# Altium PCB MDBT42Q.PcbDoc
Units mm, origin at the board's own origin, x right, y up, seen from the top; angles counter-clockwise.
Board outline 105.25 x 26.75 mm, 2 copper layers (Top Layer, Bottom Layer); 38 components, 27 nets, 160 pads, 4 vias.
Unrouted connection lines stored in the file: 1.
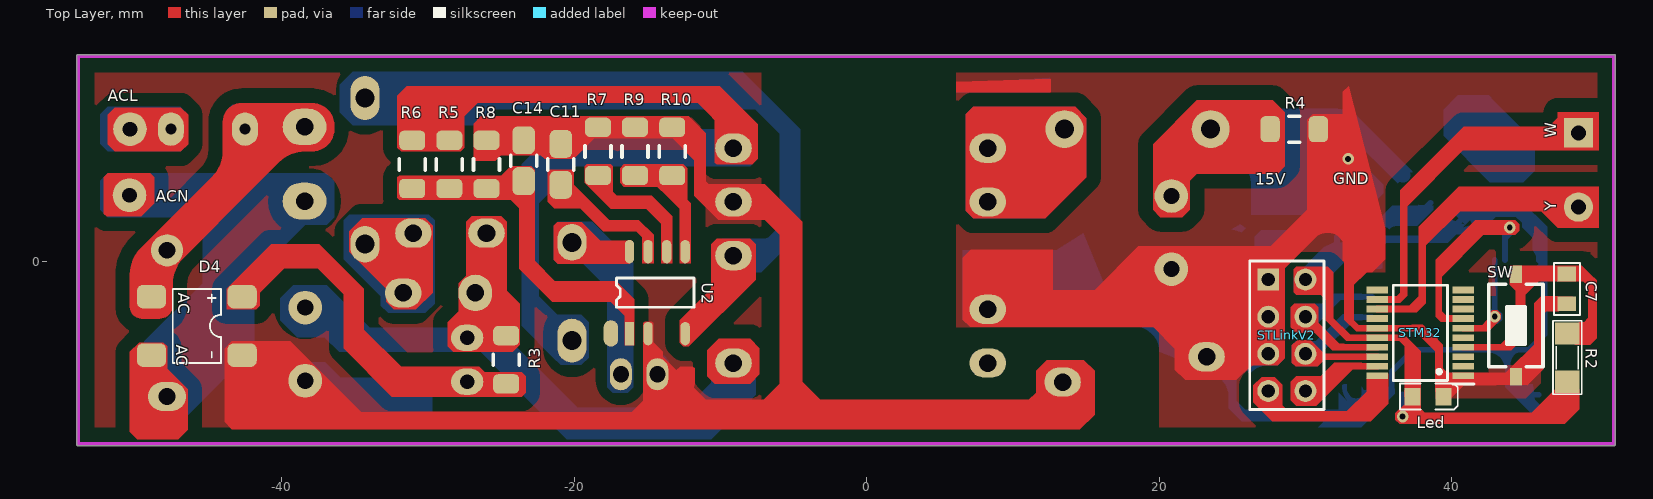
[diagram p0: Top Layer view]
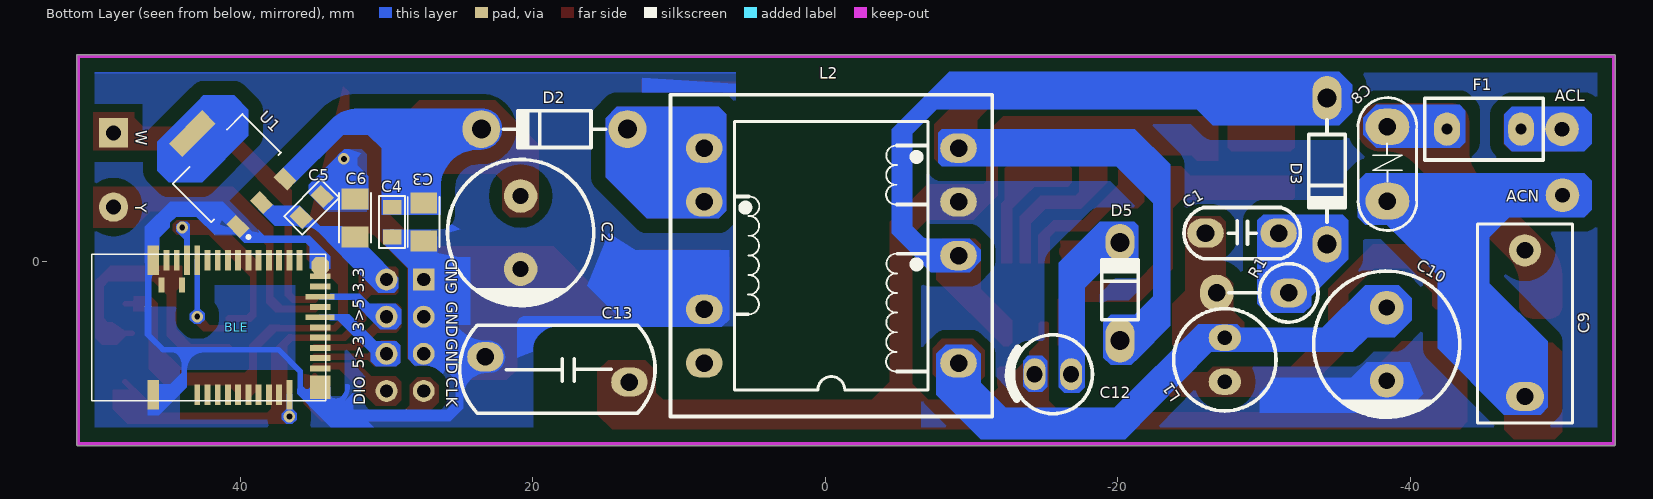
[diagram p1: Bottom Layer view, seen from below]

## Layer stack, top to bottom
Top Solder: solder mask 0.0102, Solder Resist, Dk 3.5
Top Layer: signal copper 0.0356
Dielectric1: dielectric 0.32, FR-4, Dk 4.8
Bottom Layer: signal copper 0.0356
Bottom Solder: solder mask 0.0102, Solder Resist, Dk 3.5

## Board outline
-53.923,-12.606 cw(c-53.923,-12.479) -54.05,-12.479 -54.05,14.021 cw(c-53.923,14.021) -53.921,14.148 51.077,14.148 cw(c51.077,14.021) 51.204,14.021 51.204,-12.479 cw(c51.077,-12.479) 51.077,-12.606

## Design rules (kind name [scope] priority, off if disabled: settings)
Clearance [All] p1: gap=1 ignorepadtopadclearanceinfootprint=FALSE
PlaneClearance [All] p1: clearance=1
PlaneConnect [All] p1: planeconnectstyle=Direct reliefexpansion=0.508 reliefentries=4 reliefconductorwidth=0.254 reliefairgap=0.254
PolygonConnect [All] p1: connectstyle=Direct reliefconductorwidth=0.254 reliefentries=4 polygonreliefangle="90 Angle" airgapwidth=0.254
RoutingVias [All] p1: holewidth=0.711 width=1.27 viastyle="Through Hole" minholewidth=0.711 minwidth=1.27 maxholewidth=0.711 maxwidth=1.27
SolderMaskExpansion [All] p1: expansion=0.102
Width [All] p1: maxlimit=1.016 minlimit=0.254 preferedwidth=0.635 minimp=50.000000 maximp=50.000000 favimp=50.000000
28 further rules are at their usual default settings.

## Components (designator, comment, footprint, x,y, rotation, side; value= is the part's Value field where it differs from the comment)
BLE "MODULE_MDBT42Q" PCB_MDBT42Q_10X16 50.149,-4.516 r90 bottom
C1 "1nF/1KV" 1nF/1KV -28.509,1.933 r180 bottom
C2 "220uF/25V" 220uF/25V 20.829,1.969 r90 bottom
C3 "C3216X5R1A106K160AB" CAPC3216X180 27.458,2.695 r270 bottom
C4 "2u2" 0805C-GENERIC 29.617,3.444 r270 bottom
C5 "2u2" 0805C-GENERIC 35.66,3.179 r135 bottom
C6 "C3216X5R1A106K160AB" CAPC3216X180 32.157,2.974 r90 bottom
C7 "10u" 0805C-GENERIC 47.88,-1.115 r270 top
C8 "FNR07K561" FNR07K561 -48.876,-60.821 r270 bottom
C9 "104/305V MKP" "104/305V MKP" -47.853,-4.243 r270 bottom
C10 "4.7uF/400V" 4.7uF/400V -38.404,-5.662 r180 bottom
C11 "68pF/50V" Cap_X -20.929,6.632 r0 top
C12 "10uF/50V" 10uF/50V -15.575,-7.719 r180 bottom
C13 "2.2nF" "CAP ISOLATOR" 18.314,-7.389 r180 bottom
C14 "68pF/50V" Cap_X -23.469,6.886 r0 top
D2 "SF18G" SF18G 18.521,9.045 r90 bottom
D3 "FR107" FR107 -34.315,6.175 r0 bottom
D4 "ABS16" ABS16 -45.821,-4.417 r270 top
D5 "FR107" "RF107 dung" -20.167,-2.06 r180 bottom
F1 "1A" "Cau chi hop 1A" -45.059,9.045 r180 bottom
L1 "3mH" INDUCTOR_x -27.33,-6.728 r270 bottom
L2 "EFD20" MBA-9 -0.419,0.393 r180 bottom
Led "LED SMD" LED_0805_Blue 38.38,-9.243 r0 top (schematic designator D1)
R1 "120K ohm" "R1W dung" -28.701,-2.156 r90 bottom value=1K
R2 "RESISTOR SMD" RES-SM-1206 47.905,-4.925 r270 top value=1K
R3 "5K6" RES_X#1 -24.663,-6.728 r90 top
R4 "10K" RES_X#2 29.234,9.045 r180 bottom
R5 "33K" RES_X#1 -28.549,6.634 r270 top
R6 "33K" RES_X#1 -31.089,6.634 r270 top
R7 "0R" RES_X#1 -18.389,7.521 r90 top
R8 "5K6" RES_X#1 -26.009,6.63 r90 top
R9 "2R7" RES_X#1 -15.849,7.521 r270 top
R10 "2R7" RES_X#1 -13.309,7.521 r90 top
STLinkV2 "Header 4X2" HDR2X4 27.458,-1.242 r270 top
STM32 "STM32F070F6P6" SOP65P640X120-20N 37.855,-4.884 r180 top
SW "SW-SMD" SW-SMD 44.4,-4.386 r270 top
U1 "AMS1117-3.3" SOT229P700X180-4N 40.92,6.378 r135 bottom
U2 "IC MP024-10" MP024-10 -14.325,-2.131 r0 bottom

## Footprints (in the part's own frame and the unit in brackets; to place one, negate y for a bottom-side part, rotate by r counter-clockwise, add the part's x,y. Pads: shape width x height; smd on the part's side, far side on the other; paste and mask are expansions set on the pad)
1nF/1KV [mm]
  oval 2.5x2 hole 1.2: 1(-2.5,0) 2(2.5,0)
  silkscreen extent -3.97,-1.75 3.99,1.75
4.7uF/400V [mm]
  round 2.3 hole 1.1 mask+0.127: 1(0,2.5) 2(0,-2.5)
  silkscreen extent -5,-5.02 5,5
10uF/50V [mm]
  oval 1.5x2.2 hole 1.1 mask+0.106: 1(1.25,0) 2(-1.25,0)
  silkscreen extent -3.05,-2.7 2.7,2.7
"104/305V MKP" [mm]
  round 2.2 hole 1.15: 1(-5,0)
  oval 2x2.6 hole 1.15: 2(5,0)
  silkscreen extent -6.8,-3.25 6.8,3.25
220uF/25V [mm]
  round 2.3 hole 1.1 mask+0.127: 1(2.5,0) 2(-2.5,0)
  silkscreen extent -5.02,-5 5,5
0805C-GENERIC [mil] "CAPACITOR 0805"
  rect 40x50 smd: 1(-10,0) 2(70,0)
  silkscreen extent -40,-35 100,35, body extent -11,-25 70,25, height 26
ABS16 [mm]
  rrect50% 1.6x2 smd: 1(2,-3.1) 2(-2,3.1) 3(-2,-3.1) 4(2,3.1)
  silkscreen extent -2.54,-1.65 2.54,1.65
"CAP ISOLATOR" [mm]
  oval 2.5x2 hole 1.2: 1(4.925,-0.862) 2(-4.925,0.863)
  silkscreen extent -6.68,-2.99 6.68,3.01
Cap_X [mil] "SMD, no Pol"
  rrect50% 60x75 smd: 1(0,-55) 2(0,55)
  silkscreen extent -35,-15 35,15
CAPC3216X180 [mm]
  rect 1.44x1.82 smd: 1(-1.295,0) 2(1.295,0)
  silkscreen extent -1.7,-1.09 1.7,1.09
"Cau chi hop 1A" [mil]
  oval 70x90 hole 30: 1(-100,0) 2(100,0)
  silkscreen extent -159,-83 160,83
FNR07K561 [mm]
  oval 2.5x3 hole 1.2: 1(-70.018,-10.421)
  oval 2.53x3 hole 1.2: 2(-64.938,-10.421)
  silkscreen extent -72.02,-12.43 -62.93,-8.42
FR107 [mm]
  oval 2x3 hole 1.3: 1(0,-5)
  oval 2x2.5 hole 1.3: 2(0,5)
  silkscreen extent -1.25,-3.5 1.25,3.5
HDR2X4 [mm] "Connector; Header; 4x2 Position"
  rect 1.5x1.5 hole 0.9: 1(0,0)
  round 1.5 hole 0.9: 2(0,2.54) 3(2.54,0) 4(2.54,2.54) 5(5.08,0) 6(5.08,2.54) 7(7.62,0) 8(7.62,2.54)
  silkscreen extent -1.27,-1.27 8.89,3.81, body extent -1.27,-1.27 8.89,3.81, height 7
INDUCTOR_x [mm]
  oval 1.8x2.2 hole 1 mask+0.106: 1(1.5,0) 2(-1.5,0)
  silkscreen extent -3.5,-3.5 3.5,3.5
LED_0805_Blue [mm] "Chip LED, 2-Leads, Body 2.0x1.3mm, IPC Medium Density"
  rect 1.1x1.2 smd: 1(-1.05,0) 2(1.05,0)
  silkscreen extent -1.91,-0.89 2.03,0.89, body extent -1,-0.63 1,0.62, height 0.68
MBA-9 [mm]
  oval 2.5x2 hole 1.2: 1(8.7,-7.35) 3(8.7,0) 4(8.7,3.675) 5(8.7,7.35) 6(-8.7,7.35) 7(-8.7,3.675) 9(-8.7,-3.675) 10(-8.7,-7.35)
  round 0 all layers, no hole: 2(8.7,-3.675)
  silkscreen extent -11,-11 11,11
MP024-10 [mm]
  oval 1x1.8 smd far side: 0(-3.175,2.794)
  rect 0.635x1.6 smd far side: 1(-1.904,2.81)
  oval 0.635x1.6 smd far side: 2(-0.634,2.81) 4(1.906,2.81) 5(1.906,-2.798) 6(0.636,-2.798) 7(-0.634,-2.798) 8(-1.904,-2.798)
  body extent -2.5,-1.99 2.5,2.01, height 1.75
PCB_MDBT42Q_10X16 [mm]
  rect 2x0.8 smd: 1(-4.6,-4.2) 39(4.6,-4.2)
  rect 1.4x0.4 smd: 2(-4.6,-7.2) 3(-4.6,-7.9) 4(-4.6,-8.6) 5(-4.6,-9.3) 6(-4.6,-10) 7(-4.6,-10.7) 8(-4.6,-11.4) 9(-4.6,-12.1) 10(-4.6,-12.8) 25(4.6,-14.2) 26(4.6,-13.5) 27(4.6,-12.8) 28(4.6,-12.1) 29(4.6,-11.4) 30(4.6,-10.7) 31(4.6,-10) 32(4.6,-9.3) 33(4.6,-8.6) 34(4.6,-7.9) 37(4.6,-5.8) 38(4.6,-5.1)
  rect 2x0.4 smd: 11(-4.6,-13.5) 35(4.6,-7.2) 36(4.6,-6.5)
  rect 1.4x1.4 smd: 12(-4.2,-15.6)
  rect 0.4x1.4 smd: 13(-3.5,-15.6) 14(-2.8,-15.6) 15(-2.1,-15.6) 16(-1.4,-15.6) 17(-0.7,-15.6) 18(0,-15.6) 20(1.4,-15.6) 22(2.8,-15.6) 23(3.5,-15.6)
  rect 0.4x2 smd: 19(0.7,-15.6) 21(2.1,-15.6)
  oct 1.2x1.2 smd: 24(4.2,-15.6)
  rect 1x0.4 smd: 40(2.9,-4.75) 41(2.9,-6.15)
  silkscreen extent -5,-16 5,0
"R1W dung" [mm]
  oval 2x2.5 hole 1.2: 1(0,-3)
  oval 2.5x2.3 hole 1.2: 2(0,1.93)
  silkscreen extent -2,-5 2,1.1
RES-SM-1206 [mil]
  rect 60x65 smd: 1(0,0) 2(130,0)
  silkscreen extent -34,-38 164,39, body extent 2,-31 128,31, height 40
RES_X#1 [mm]
  rrect50% 1.32x1.778 smd: 1(-1.649,0) 2(1.649,0)
  silkscreen extent -0.38,-0.89 0.38,0.89
RES_X#2 [mm]
  rrect50% 1.32x1.778 smd far side: 1(-1.649,0) 2(1.649,0)
"RF107 dung" [mm]
  oval 2x3 hole 1.3: 1(0,-3.358)
  oval 2x2.5 hole 1.3: 2(0,3.358)
  silkscreen extent -1.25,-1.94 1.27,2.17
SF18G [mm]
  round 2.6 hole 1.3: 1(0,-5) 2(0,5)
  silkscreen extent -1.25,-3.5 1.25,3.5
SOP65P640X120-20N [mm]
  rect 1.475x0.45 smd: 1(-2.938,2.925) 2(-2.938,2.275) 3(-2.938,1.625) 4(-2.938,0.975) 5(-2.938,0.325) 6(-2.938,-0.325) 7(-2.938,-0.975) 8(-2.938,-1.625) 9(-2.938,-2.275) 10(-2.938,-2.925) 11(2.938,-2.925) 12(2.938,-2.275) 13(2.938,-1.625) 14(2.938,-0.975) 15(2.938,-0.325) 16(2.938,0.325) 17(2.938,0.975) 18(2.938,1.625) 19(2.938,2.275) 20(2.938,2.925)
  silkscreen extent -3.68,-3.25 1.85,3.5, body extent -2.25,-3.3 2.25,3.3
SOT229P700X180-4N [mm]
  rect 0.93x1.31 smd: 1(-2.29,-3.345) 2(0,-3.345) 3(2.29,-3.345)
  rect 3.24x1.31 smd: 4(0,3.345)
  silkscreen extent -3.36,-4.47 3.36,1.86
SW-SMD [mm] "Switch SMD type"
  rect 1.2x0.8 smd: 1(-3.5,0) 2(3.5,0)
  silkscreen extent -2.82,-1.85 2.82,1.85, body extent -3.05,-1.85 3.05,1.85, height 2.5

## Part data
BLE: "MDBT42Q"
C1 C11 C13 C14: library part CAP, "Capacitor"
C2 C10 C12: library part ELECTRO0
C3: "C Series 1206 10 uF 10 V ±10 % Tolerance X5R SMT Multilayer Ceramic Capacitor. T? Tantalium", Package="1206 TDK", Availability=Unavailable, MF=TDK, MP=C3216X5R1A106K160AB, Price="0.19 USD", SnapEDA_Link=https://www.snapeda.com/parts/C3216X5R1A106K160AB/TDK/view-part/?ref=snap
C4 C5 C7: library part 0805C-2U2-6V3-X5R-PAN, "CAPACITOR 0805 CERAMIC", Manufacturer="Panasonic - ECG", Manufacturer Part Number=ECJ-1VB0J225K, Supplier Part Number 1=PCC2273TR-ND, Reel=C7, Supplier 1=Digi-Key
C6: "C Series 1206 10 uF 10 V ±10 % Tolerance X5R SMT Multilayer Ceramic Capacitor", Package="1206 TDK", Availability=Unavailable, MF=TDK, MP=C3216X5R1A106K160AB, Price="0.19 USD", SnapEDA_Link=https://www.snapeda.com/parts/C3216X5R1A106K160AB/TDK/view-part/?ref=snap
C8 C9: library part Cap, "Capacitor"
D2: library part DIODE, "Diode"
D3 D5: library part DIODE0
D4: library part BRIDGE1, "Diode Bridge"
F1: library part Res, "Resistor"
L1: library part INDUCTOR1
L2: library part TRANS-EE
Led: "LED"
R1: library part RESC, "Resistor"
R2: "Resistor"
R3 R4 R5 R6 R7 R8 R9 R10: library part RES1A
STLinkV2: "Header, 4-Pin, Dual row", LatestRevisionDate=17-Jul-2002, LatestRevisionNote="Re-released for DXP Platform.", Publisher="Altium Limited"
STM32: "STMICROELECTRONICS - STM32F070F6P6 - MCU, 32BIT, CORTEX-M0, 48MHZ, TSSOP-20", Manufacturer_Name=STMicroelectronics, Arrow Part Number=STM32F070F6P6, Arrow Price/Stock=https://www.arrow.com/en/products/stm32f070f6p6/stmicroelectronics, Datasheet Link=http://www.st.com/content/ccc/resource/technical/document/datasheet/31/4f/10/5f/a5/32/46/42/DM00141386.pdf/files/DM00141386.pdf/jcr:content/translations/en.DM00141386.pdf, Geometry.Height=1.2mm, Manufacturer_Part_Number=STM32F070F6P6
SW: "Switch", LatestRevisionDate=17-Jul-2002, LatestRevisionNote="Re-released for DXP Platform.", PackageReference=SPST-2, Published=24-Mar-1999, Publisher="Altium Limited"
U1: "Sot223/Pkg 1-Amp 3.3-Volt Low Drop Out Voltage Regulatator", Package=None, Availability=Unavailable, MF="Advanced Monolithic Systems", MP=AMS1117-3.3, Price=None, SnapEDA_Link=https://www.snapeda.com/parts/AMS1117-3.3/Advanced%20Monolithic%20Systems/view-part/?ref=snap

## Free pads (board coordinates)
  rect 2x2 hole 1.016: 4(48.667,8.791)
  round 2 hole 1.016: 5(48.667,3.711)
  round 2.3 hole 1: 7(-50.393,9.045) 8(-50.423,4.521)

## Via types
v1: diameter 0.8, hole 0.4, Top Layer to Bottom Layer, 4 vias

## Nets (pads, with @x,y where several pads share a name; then routed paths per layer and width w, separated by ;. In a path a pad name is that pad's centre, name@x,y a point inside that pad or via, vN(x,y) a via of type N, cw(c..) or ccw(c..) an arc to the next point about the centre after c; other vN are vias at no path point)
32>52: BLE.21 STLinkV2.4 STM32.17 | length 10.9
  Top Layer w0.381: STLinkV2.4 32.075,-5.859
  Top Layer w0.45: 32.075,-5.859 STM32.17
  Bottom Layer w0.381: STLinkV2.4 30.704,-3.782 32.07,-2.416 BLE.21
52>32: BLE.19 STLinkV2.6 STM32.18 | length 10.6
  Top Layer w0.381: STLinkV2.6 STLinkV2.6@30.185,-6.509
  Top Layer w0.45: STLinkV2.6@30.185,-6.509 STM32.18
  Bottom Layer w0.381: STLinkV2.6 30.488,-6.322 32.994,-3.816 BLE.19
+3.3V: BLE.11 C5.1 C6.1 Led.1 R2.2 STLinkV2.2 STM32.16 U1.2 | length 40.5
  Top Layer w0.381: STLinkV2.2 31.268,-1.242 31.688,-1.662 31.688,-3.948 32.949,-5.209 ; 36.505,-5.209 37.33,-6.034 Led.1 ; v1(36.649,-10.611) 45.441,-10.691 R2.2 ; 37.33,-9.971 37.33,-9.93
  Top Layer w0.4: v1(36.649,-10.611) 37.33,-9.93 Led.1
  Top Layer w0.45: 32.949,-5.209 STM32.16 36.505,-5.209
  Bottom Layer w0.381: STLinkV2.2 32.157,0.917 C6.1 34.073,1.679 35.394,3 C5.1 37.542,3 U1.2
  Bottom Layer w0.4: v1(36.649,-10.611) BLE.11
+15V: C2.1 C3.1 C4.1 D2.2 R4.2 U1.3 | length 32
  Top Layer w1.016: C2.1 20.829,6.784 23.089,9.045 D2.2 ; 27.458,7.013 27.585,7.14 R4.2
  Bottom Layer w0.381: C3.1 27.75,3.698 C4.1
  Bottom Layer w1.016: D2.2 25.426,9.045 27.458,7.013 ; C4.1 29.325,3.99 C3.1 27.458,7.013 ; U1.3@36.678,5.89 33.268,9.299 29.744,9.299 27.458,7.013
CLK: STLinkV2.7 STM32.20 | length 10.3
  Top Layer w0.381: STLinkV2.7 27.458,-9.878 28.125,-10.545 32.932,-10.545 34.917,-8.56 STM32.20
DIO: STLinkV2.8 STM32.19 | length 5.6
  Top Layer w0.45: STLinkV2.8 30.702,-8.862 32.405,-7.159 STM32.19
DRAIN: D3.1 L2.3 U2.4 | length 48.1
  Top Layer w0.635: U2.4 -9.119,-1.641 L2.3
  Bottom Layer w1.016: D3.1 -7.514,11.175 -5.206,8.867 -5.206,2.111 -6.924,0.393 L2.3
GND: C10.2 C11.2 C12.2 C13.1 C14.2 D4.4 L2.4 R7.2 R8.2 R9.1 R10.2 U2.2 | length 104.1
  Top Layer w0.635: C14.2@-23.473,8.279 C14.2 ; U2.2 -14.959,-5.815 -14.325,-6.449 C12.2 ; R10.2 -12.56,9.17 -11.419,8.029 -11.419,5.377 -10.11,4.068 L2.4
  Top Layer w1.016: D4.4@-42.738,-6.434 -41.01,-8.162 C10.2 -35.773,-10.792 -13.08,-10.792 -12.293,-10.005 ; R8.2 C14.2@-23.473,8.279 ; C14.2 -21.691,8.283 -21.183,7.775 C11.2 -19.788,9.17 R7.2 R10.2 ; C12.2 -14.325,-7.973 -12.293,-10.005 ; L2.4 -6.681,4.068 -5.181,2.568 -5.181,-8.786 -6.4,-10.005 ; C13.1 11.635,-10.005 -6.4,-10.005 ; -12.293,-10.005 -6.4,-10.005
GND2: BLE.1 BLE.12 BLE.24 BLE.39 C2.2 C3.2 C4.2 C5.2 C6.2 C7.2 C13.2 L2.9 Led.2 R4.1 STLinkV2.1 STLinkV2.3 STLinkV2.5 STM32.1 STM32.15 SW.2 U1.1 | length 146.4
  Top Layer w0.381: STLinkV2.1 32.919,4.219 ; v1@32.792,7.14 v1(32.919,7.013) 32.919,4.219 ; 33.569,-4.559 32.919,-3.909 32.919,4.219 ; 37.633,-4.559 39.15,-6.076 39.15,-7.326 39.633,-7.809 ; Led.2 40.793,-7.88 STM32.1 ; SW.2@44.322,-7.809 SW.2 ; SW.2@44.4,-7.981 45.949,-6.432 45.949,-3.706 46.762,-2.893 C7.2
  Top Layer w0.45: 33.569,-4.559 STM32.15 37.633,-4.559 ; 39.633,-7.809 STM32.1 SW.2@44.322,-7.809
  Top Layer w1.016: L2.9 16.553,-3.282 19.305,-0.531 C2.2 26.747,-0.531 STLinkV2.1 STLinkV2.3 ; C13.2 24.714,-6.526 STLinkV2.3 ; STLinkV2.5 STLinkV2.3 ; R4.1 30.887,9.045 v1@32.792,7.14
  Bottom Layer w0.381: 26.696,-6.322 25.045,-7.973 25.045,-9.751 25.839,-10.545 33.285,-10.545 BLE.12@34.468,-9.362 ; BLE.12 34.549,-9.282 BLE.12@34.468,-9.362 ; BLE.24 34.549,0.572 35.46,1.483 39.263,1.483 U1.1 41.187,3.406 44.347,3.406 45.949,1.804 BLE.39 46.254,-0.221 46.254,-5.066 45.289,-6.031 43.841,-6.031 ; BLE.1 45.238,-9.116 43.841,-7.719 43.841,-6.031 ; BLE.12@34.468,-9.362 35.441,-9.362 35.916,-8.887 35.916,-7.516 37.401,-6.031 43.841,-6.031
  Bottom Layer w1.016: 26.696,-6.322 STLinkV2.5 ; STLinkV2.5@27.458,-6.329 STLinkV2.5 ; C4.2 29.351,1.4 C3.2 STLinkV2.5 ; C6.2 C6.2@32.325,4.437 ; v1(32.919,7.013) 32.919,5.031 C6.2@32.325,4.437 ; C5.2 C6.2@32.325,4.437
MD_RESET: BLE.35 STM32.6 | length 6.3
  Top Layer w0.381: 42.175,-4.559 v1@42.952,-3.782
  Top Layer w0.45: STM32.6 42.175,-4.559
  Bottom Layer w0.381: v1(42.949,-3.779) v1@42.952,-3.782
  Bottom Layer w0.4: v1(42.949,-3.779) BLE.35
NetC1_1: C1.1 C10.1 L1.2 L2.1 R1.2 R3.2 | length 47.1
  Top Layer w1.016: L1.2 -24.812,-5.228 R3.2 -24.663,-3.376 -25.882,-2.156 R1.2 -26.771,1.171 C1.1
  Bottom Layer w1.016: C10.1 -36.337,-5.228 L1.2 -25.452,-5.228 -22.936,-7.744 -22.936,-8.481 -20.751,-10.665 -10.871,-10.665 -9.119,-8.914 L2.1 L2.1@-9.119,-6.829
NetC1_2: C1.2 D3.2 R1.1 | length 8.7
  Top Layer w1.016: R1.1@-31.501,-2.639 R1.1@-31.009,-2.147
  Bottom Layer w1.016: D3.2 -33.557,1.933 C1.2 -31.009,-1.464 R1.1
NetC7_1: C7.1 R2.1 STM32.4 SW.1 | length 19.4
  Top Layer w0.381: 43.847,-5.859 44.781,-4.925 44.781,-1.267 SW.1 ; SW.1@44.476,-0.861 C7.1 49.073,-0.861 49.556,-1.344 49.556,-4.595 49.226,-4.925 R2.1 R2.1@47.397,-4.925
  Top Layer w0.45: STM32.4 43.847,-5.859
NetC8_1: C8.1 C9.1 D4.3 F1.1 | length 19.2
  Top Layer w1.016: D4.3 -48.921,-0.311 C9.1 -47.759,0.757 -42.519,5.997 F1.1 -38.607,9.045 C8.1 C8.1@-39.319,9.197
NetC8_2: C8.2 C9.2 D4.1 pad.8 | length 19.7
  Top Layer w1.016: D4.1 -48.921,-8.175 C9.2
  Bottom Layer w1.016: C9.2@-47.65,-8.473 -44.653,-5.476 -44.653,-2.741 -38.455,3.457 C8.2
NetC11_1: C11.1 U2.7 | length 8.5
  Top Layer w0.635: C11.1 -20.675,5.235 -17.881,2.441 -15.722,2.441 -14.959,1.678 U2.7
NetC12_1: C12.1 D5.2 U2.8 | length 14.3
  Top Layer w1.016: D5.2 -19.536,0.667 U2.8@-16.484,0.667
  Bottom Layer w1.016: D5.2 -16.825,-2.044 C12.1
NetC14_1: C14.1 R5.2 R6.2 R8.1 U2.1 | length 22.9
  Top Layer w0.635: R6.2 R5.2 -26.013,4.985 R8.1 -23.723,4.981 -23.469,5.235 -23.469,0.155 -21.183,-2.131 -17.71,-2.131 -16.229,-3.611 U2.1
NetD2_1: D2.1 L2.7 | length 16.5
  Top Layer w1.016: L2.7 10.162,4.068 13.521,7.427 D2.1
  Bottom Layer w1.016: L2.7 10.162,4.068 13.521,7.427 D2.1
NetD4_2: D4.2 L1.1 R3.1 | length 24.4
  Top Layer w1.016: D4.2 -40.022,0.282 -37.388,0.282 -35.102,-2.004 -35.102,-4.874 -31.748,-8.228 L1.1 -24.812,-8.228 R3.1
NetD5_1: D5.1 L2.5 R5.1 R6.1 | length 54.2
  Top Layer w1.016: R5.1 R6.1 -28.041,11.331 -11.357,11.331 -9.119,9.093 L2.5
  Bottom Layer w1.016: D5.1 -22.961,-2.624 -22.961,4.244 -19.462,7.743 L2.5
NetF1_2: F1.2 pad.7 | length 5.6
  Top Layer w1.016: pad.7 F1.2
  Bottom Layer w1.016: pad.7 F1.2
NetR7_1: R7.1 U2.6 | length 8.4
  Top Layer w0.635: R7.1 -18.389,5.362 -16.992,3.965 -14.833,3.965 -13.689,2.821 U2.6
NetR9_2: R9.2 R10.1 U2.5 | length 8.1
  Top Layer w0.635: R10.1 -13.309,4.727 -12.419,3.837 U2.5
  Top Layer w1.016: R9.2 R10.1
PWM_WHITE: pad.4 STM32.12 | length 22.3
  Top Layer w0.381: 36.251,-2.609 36.729,-2.131 36.729,4.448 41.072,8.791 pad.4
  Top Layer w0.45: STM32.12 36.251,-2.609
PWM_YELLOW: pad.5 STM32.13 | length 19
  Top Layer w0.381: 37.125,-3.259 37.999,-2.385 37.999,1.476 40.336,3.813 48.565,3.813 pad.5
  Top Layer w0.45: STM32.13 37.125,-3.259
SWDCLK: BLE.36 STM32.7 | length 13
  Top Layer w0.381: 39.523,-3.909 39.127,-3.513 39.127,-0.796 42.172,2.25 v1@43.968,2.25
  Top Layer w0.45: 39.523,-3.909 STM32.7
  Bottom Layer w0.4: BLE.36 43.649,1.995 v1(43.968,2.314)
pads on no net: BLE.2 BLE.3 BLE.4 BLE.5 BLE.6 BLE.7 BLE.8 BLE.9 BLE.10 BLE.13 BLE.14 BLE.15 BLE.16 BLE.17 BLE.18 BLE.20 BLE.22 BLE.23 BLE.25 BLE.26 BLE.27 BLE.28 BLE.29 BLE.30 BLE.31 BLE.32 BLE.33 BLE.34 BLE.37 BLE.38 BLE.40 BLE.41 L2.2 L2.6 L2.10 STM32.2 STM32.3 STM32.5 STM32.8 STM32.9 STM32.10 STM32.11 STM32.14 U1.4 U2.0

## Polygon pours and split planes (outlines as drawn)
GND2 on Top Layer "NONET_L-01_P-001" (solid, pour order 21): 6.122,14.021 6.122,-4.493 19.99,-4.493 19.99,-12.479 51.077,-12.479 51.077,14.021 50.953,14.021
GND on Top Layer "NONET_L-01_P-001" (solid, pour order 19): -53.923,14.021 -7.213,14.021 -7.213,-12.479 -53.923,-12.479
no net on Top Layer "NONET_L-01_P-001" (solid, pour order 17): -53.568,13.744
no net on Top Layer "NONET_L-01_P-001" (solid, pour order 15): 45.518,7.585
no net on Top Layer "NONET_L01_P011" (solid, pour order 11): -42.003,-8.67
GND2 on Top Layer "GND2_L01_P001" (solid, pour order 1): -40.969,-10.399
GND2 on Bottom Layer "NONET_L-01_P-001" (solid, pour order 27): 51.077,-12.479 19.965,-12.479 19.965,-4.442 6.122,-4.442 6.122,14.021 51.077,14.021
GND on Bottom Layer "NONET_L-01_P-001" (solid, pour order 23): -53.923,14.021 -6.578,14.021 -6.578,-12.479 -53.923,-12.479
no net on Bottom Layer "NONET_L-01_P-001" (solid, pour order 25): 6.122,12.884 49.94,12.884

## Keep-outs
Keep-Out Layer:
  lines w0.254: -53.923,-12.479 -53.923,14.021 51.077,14.021 51.077,-12.479 -53.923,-12.479

## Other copper
Top Layer:
  region net GND2: 30.684,1.629 cw(c31.448,0.865) 31.448,1.945 31.598,1.945 cw(c31.598,0.874) 32.665,0.957 32.665,-3.978 33.47,-4.783 33.627,-4.783 33.613,-4.334 33.3,-4.021 33.3,9.426 32.665,10.061 30.506,10.061 30.125,9.68 30.125,3.527 27.619,1.021 18.577,1.021 15.577,-1.979 12.726,-1.979 12.726,0.79 7.113,0.79 6.577,0.254 6.577,-3.325 6.577,-3.979 7.077,-4.479 19.577,-4.479 21.077,-5.979 21.077,-7.4 21.786,-8.109 25.271,-8.109 26.289,-7.091 28.105,-7.091 28.577,-6.619 28.577,-0.479
  region: -41.825,5.185 -41.816,5.176 -40.215,6.777 cw(c-38.419,4.981) -38.419,7.521 -37.947,7.521 ccw(c-37.947,9.045) -36.423,9.045 -36.423,9.299 ccw(c-37.947,9.299) -37.947,10.823 -42.773,10.823 ccw(c-42.773,9.553) -44.043,9.553 -44.043,7.557 cw(c-46.583,7.557) -44.787,5.761 -49.649,0.899 ccw(c-47.853,-0.897) -50.393,-0.897 -50.393,-3.147 ccw(c-49.631,-3.147) -49.631,-3.909 -48.361,-3.909 ccw(c-48.361,-3.02) -47.472,-3.02 -47.472,-1.532 cw(c-44.932,-1.532) -46.728,0.264 -41.993,4.999 ccw(c-43.789,6.795)
  region net GND2: 6.122,12.286 6.122,11.578 12.594,11.578 12.594,12.507
  region: 42.17,-4.784 42.545,-4.784 43.362,-3.967 43.362,-3.598 43.117,-3.353 42.779,-3.353 42.534,-3.598 42.534,-3.898 41.94,-4.491 40.809,-4.491
  region net GND2: 35.466,2.236 35.466,0.162 34.57,-0.734 34.189,-0.734 33.249,-1.674 32.944,-1.369 32.665,-1.369 32.665,-0.069 32.542,0.054 32.542,11.589 32.944,11.991
  pour cut-out: 37.381,-9.577 37.879,-8.644 37.737,-8.786 37.032,-8.786 37.032,-9.227
  region net +3.3V: 47.718,-11.113 48.729,-10.103 48.729,-8.795 47.46,-8.795 47.372,-8.883 47.372,-8.682 47.154,-8.682 45.476,-10.36 38.166,-10.36 37.88,-10.076 37.88,-6.142 36.719,-4.981 36.485,-4.981 36.378,-5.397 36.781,-5.799 36.781,-8.786 36.771,-8.795 36.781,-9.77 36.15,-10.401 36.145,-10.82 36.438,-11.113
  pour cut-out: 15.515,-10.377 15.577,-10.377 15.459,-10.321
  region net GND: -11.923,-11.479 14.577,-11.479 15.577,-10.479 15.577,-10.377 15.515,-10.377 15.459,-10.321 15.577,-10.377 15.577,-7.479 14.852,-6.754 12.302,-6.754 11.577,-7.479 11.577,-8.979 11.077,-9.479 -11.01,-9.479 -11.83,-8.659 -11.778,-8.331 -11.778,-7.319 -11.905,-7.192 -12.757,-7.192 -13.027,-7.462 -13.953,-6.536 -13.953,-6.186 -14.623,-5.516 -14.623,-4.205 -14.71,-4.118 -15.202,-4.118 -15.275,-4.191 -15.275,-4.442 -15.278,-4.683 -15.278,-9.533 -16.351,-10.607 -34.295,-10.607 -39.423,-5.479 -43.423,-5.479 -43.923,-5.979 -43.923,-10.979 -43.423,-11.479
  region net GND: -11.643,-11.006
  region net GND: -11.785,6.912 -11.785,4.473 -10.159,2.847 -6.984,2.847 -5.943,1.806 -5.943,-8.354 -7.086,-9.497 -3.149,-9.497 -4.419,-8.227 -4.419,2.695 -6.984,5.26 -10.794,5.26 -11.023,5.489 -11.023,8.776 -12.181,9.934 -19.786,9.934 -26.39,9.934 -26.898,9.426 -26.898,6.886 -25.411,6.886 -25.411,6.879 -25.022,7.267 -22.297,7.267 -22.043,7.013 -20.04,7.013 -18.643,8.41 -13.283,8.41
  region net NetC11_1: -19.583,3.635 -18.011,2.063 -15.468,2.063 -15.341,1.936 -15.341,-0.137 -14.579,-0.137 -14.579,1.806 -15.595,2.822 -17.627,2.822 -20.04,5.235 -20.04,6.251 -21.818,6.251 -21.818,4.092 -21.361,3.635
  region net PWM_YELLOW: 47.067,6.734
  region net NetC1_1: -7.975,-5.306 -7.34,-5.941 -7.34,-7.719 -7.975,-8.354 -10.388,-8.354 -10.896,-7.846 -10.896,-6.068 -10.134,-5.306
  region: 6.757,4.752 6.757,3.457 7.265,2.949 12.218,2.949 15.021,5.752 15.021,9.798 14.25,10.569 7.265,10.569 6.757,10.061 6.757,4.752
  region: 49.708,1.577
  region net SWDCLK: 39.581,-4.131 39.25,-4.131 38.916,-3.798 38.916,0.118 41.621,2.822 43.638,2.822 44.349,2.822 44.623,2.548 44.623,2.08 44.349,1.806 42.166,1.806 39.321,-1.039 39.319,-3.425 39.581,-3.688
  region net NetC1_2: -30.2,2.949 -29.692,2.441 -29.692,-2.131 -30.835,-3.274 -32.359,-3.274 -32.867,-2.766 -32.867,-1.877 -35.407,0.663 -35.407,2.06 -34.518,2.949
  region net PWM_YELLOW: 47.27,2.314 50.064,2.314 50.064,5.108 40.488,5.108 37.745,2.365 37.745,-2.512 37.078,-3.484 37.623,-3.484 38.236,-2.871 38.236,1.094 40.582,3.44 46.144,3.44
  pour cut-out: 36.581,3.234 36.729,0.98 36.729,3.118 36.713,3.102
  region net PWM_WHITE: 36.22,-2.829 36.471,-2.829 36.947,-2.353 36.947,3.773 40.759,7.585 50.064,7.585 50.064,10.188 47.27,10.188 47.27,9.807 46.655,9.192 40.813,9.192 36.475,4.854 36.475,3.34 36.475,-2.357 36.489,-2.371 36.251,-2.609 36.154,-2.512 35.84,-2.512
  pour cut-out: 36.729,4.346 36.475,4.854 36.729,0.98
  region: 36.475,4.813
  region: 36.475,4.813
  pour cut-out: 49.38,-0.979 49.409,-0.979 49.394,-0.964
  region net NetC7_1: 47.646,-4.901 48.431,-5.686 49.492,-5.686 49.906,-5.272 49.906,-1.306 49.476,-0.882 48.886,-0.286 44.28,-0.286 44.004,-0.285 43.968,-0.321 43.968,-1.585 44.4,-2.017 44.4,-4.62 43.206,-5.814 43.251,-5.859 43.607,-5.859 43.56,-6.081 44.076,-6.081 45.023,-5.134 45.023,-2.293 45.949,-1.367 47.381,-1.367 48.991,-1.364 49.357,-1.725 49.357,-3.87 49.063,-4.164 48.729,-4.164
  region net GND2: 43.054,-8.485 45.174,-8.485 46.27,-7.389 46.27,-5.768 45.914,-5.412 43.706,-7.619 43.262,-7.619 43.015,-7.866 40.459,-7.866 39.793,-7.857 39.374,-7.438 39.374,-5.696 38.012,-4.334 37.282,-4.334 37.282,-4.554 38.879,-6.151 38.879,-8.875 39.626,-9.544 39.626,-9.385 39.776,-9.535 40.827,-8.485
  region net GND2: 46.301,-3.4 47.308,-3.4 47.325,-2.636 47.278,-2.589 47.278,-2.385 46.114,-2.385 45.647,-2.853 45.647,-6.616 46.27,-5.992 46.27,-3.432
  region: 47.251,-3.403
  region net CLK: 34.179,-7.99 34.179,-8.901 32.833,-10.247 28.843,-10.247 28.423,-9.827 28.423,-8.43 27.915,-7.922 27.001,-7.922 26.442,-8.481 26.442,-9.64 27.72,-10.918 34.456,-10.918 35.653,-9.721 35.653,-7.681
  region net CLK: 33.855,-6.934 31.957,-6.934 31.045,-7.846 29.363,-7.846 28.982,-8.227 28.982,-9.497 29.363,-9.878 30.735,-9.878 33.229,-7.384 33.855,-7.384
  region net 52>32: 31.268,-6.284 30.366,-5.382 29.427,-5.382 29.073,-5.736 29.073,-6.921 29.329,-7.176 30.826,-7.176 31.627,-6.375 31.785,-6.375
  region net 32>52: 32.64,-5.636 32.309,-5.636 30.887,-4.214 30.887,-3.147 30.633,-2.893 29.236,-2.893 28.982,-3.147 28.982,-4.519 29.338,-4.874 30.633,-4.874 31.842,-6.084 32.41,-6.084 32.41,-6.067 32.489,-5.988
  region net 32>52: 32.157,-5.636
  region net +3.3V: 33.013,-4.985 31.907,-3.878 31.907,-0.738 31.522,-0.353 29.363,-0.353 29.184,-0.532 29.184,-2.104 29.375,-2.295 31.051,-2.295 31.395,-2.639 31.395,-4.036 32.792,-5.433 33.3,-5.433
  pour cut-out: 28.07,0.028 28.577,-0.479 28.07,0.028
  pour cut-out: 28.07,0.028 28.577,-0.479 28.07,0.028
  region: 25.807,1.044
  region: 22.553,5.997 28.093,5.997 28.601,6.505 28.601,10.188 27.768,11.021 22.577,11.021 19.577,8.021 19.577,3.521 20.077,3.021 21.577,3.021 22.077,3.521 22.077,5.521
  region net NetD5_1: -10.388,6.759 -10.261,6.632 -7.848,6.632 -7.467,7.013 -7.467,9.375 -10.058,11.966 -31.47,11.966 -32.105,11.331 -32.105,7.775 -31.851,7.521 -27.787,7.521 -27.533,7.775 -27.533,9.934 -26.263,11.204 -26.39,11.331 -11.357,11.331 -11.357,10.649 -10.388,9.68
  region net NetR7_1: -14.071,2.568 -15.087,3.584 -17.5,3.584 -19.278,5.362 -19.278,6.505 -19.151,6.632 -17.5,6.632 -17.373,6.505 -17.373,4.727 -17.119,4.473 -14.706,4.473 -13.309,3.076 -13.309,-0.137 -14.071,-0.137
  region net NetC8_2: -51.923,6.021 -49.02,6.021 -48.742,5.743 -48.742,3.965 -49.631,3.076 -51.978,3.076 -52.173,3.271 -52.173,5.771
  region: -51.923,6.021
  region: -46.923,10.521 -46.423,10.021 -46.423,8.021 -46.923,7.521 -51.423,7.521 -51.923,8.021 -51.923,10.021 -51.423,10.521
  region: -27.787,9.045
  region net NetD4_2: -41.757,-3.274 -41.503,-3.02 -41.503,-2.131 -39.852,-0.48 -37.566,-0.48 -35.788,-2.258 -35.788,-5.941 -32.486,-9.243 -23.596,-9.243 -23.342,-8.989 -23.342,-7.846 -23.596,-7.592 -26.136,-7.592 -26.517,-7.211 -31.851,-7.211 -34.391,-4.671 -34.391,-1.877 -37.439,1.171 -40.741,1.171 -43.789,-1.877 -43.789,-3.274
  region net NetC8_2: -47.853,-7.338 -46.456,-8.735 -46.456,-11.529 -47.091,-12.164 -49.885,-12.164 -50.393,-11.656 -50.393,-6.195 -49.758,-5.56 -48.107,-5.56 -47.853,-5.814
  region net NetC1_1: -27.914,-1.496 -27.406,-0.988 -27.406,2.695 -27.025,3.076 -24.993,3.076 -24.612,2.695 -24.612,-2.004 -23.723,-2.893 -23.723,-5.687 -24.231,-6.195 -28.295,-6.195 -28.676,-5.814 -28.676,-4.163 -27.914,-3.401
  region net NetR9_2: -14.325,5.108 -13.69,4.473 -12.801,3.584 -12.801,-0.137 -12.039,-0.137 -12.039,3.965 -12.293,4.219 -12.293,5.362 -12.293,6.378 -12.547,6.632 -16.611,6.632 -16.865,6.378 -16.865,5.362 -16.611,5.108
  region net GND: -2.641,-9.497 -2.133,-10.005 -2.133,-9.497
  pour cut-out: -20.167,8.537 -19.786,8.918 -20.675,8.918 -21.056,8.537
  region net NetC12_1: -16.21,-0.157 -21.152,-0.157 -21.417,0.108 -21.417,2.421 -21.163,2.675 -19.512,2.675 -18.242,1.405 -16.083,1.405
  region net DRAIN: -7.594,-1.242 -7.594,1.171 -7.975,1.552 -10.261,1.552 -10.642,1.171 -10.642,-1.877 -12.801,-4.036 -12.801,-5.56 -12.547,-5.814 -12.166,-5.814
  region net NetC14_1: -31.978,4.219 -24.358,4.219 -23.723,3.584 -23.723,2.568 -23.459,2.304 -23.459,0.398 -23.479,0.378 -23.785,0.335 -23.785,-0.507 -21.526,-2.766 -17.49,-2.766 -16.549,-3.707 -16.549,-5.752 -16.427,-5.752 -15.911,-5.752 -15.911,-2.577 -17.137,-1.351 -21.328,-1.351 -22.707,0.028 -22.707,6.251 -22.961,6.505 -24.358,6.505 -24.993,5.87 -31.978,5.87 -32.105,5.743 -32.105,4.346
  region: -22.707,2.568
  region: -31.851,5.489
  pour cut-out: 15.515,-10.377 15.577,-10.377 15.459,-10.321
  pour cut-out: 15.515,-10.377 15.577,-10.377 15.459,-10.321
  pour cut-out: 15.459,-10.321 15.515,-10.377 15.577,-10.377
  region: -45.821,7.521
  region: -45.821,7.775
Bottom Layer:
  region net GND2: 33.854,-8.558 33.854,-9.009 cw(c33.417,-9.009) 33.726,-9.318 33.818,-9.41 ccw(c34.004,-9.224) 34.004,-9.487 cw(c34.197,-9.487) 34.061,-9.351 34.207,-9.204
  region net GND2: 33.858,-9.22 cw(c33.462,-8.825) 33.462,-9.384 33.441,-9.384 cw(c33.441,-8.872) 33.079,-9.234 33.061,-9.216 cw(c33.618,-8.659) 32.83,-8.659 32.83,-8.392 32.723,-8.392 ccw(c32.723,-8.679) 32.52,-8.476 ccw(c34.337,-8.476) 33.052,-9.761 33.211,-9.92 33.29,-9.841 cw(c33.645,-10.196) 33.645,-9.694
  region net GND2: 40.294,3.144 40.934,2.504 41.49,3.06 44.386,3.06 44.817,2.629 44.817,2.345 45.55,1.612 45.55,0.784 45.949,0.084 46.101,-0.067 45.553,-0.615 cw(c45.553,-1.128) 46.066,-1.128 46.066,-1.162 ccw(c46.066,-1.102) 46.126,-1.102 46.254,-0.437 46.254,-5.098 45.274,-5.948 44,-5.948 ccw(c44,-6.008) 44,-5.948 ccw(c44,-6.008) 43.939,-6.008 43.939,-6.198 43.81,-6.198 ccw(c44.049,-5.898) 43.939,-6.265 43.939,-6.873 ccw(c44.023,-6.873) 44.023,-6.956 cw(c44.766,-6.956) 44.766,-6.213 45.335,-6.213 46.254,-5.326 46.53,-5.06 46.53,2.355 44.802,4.083 41.216,4.083 40.294,3.161
  region net GND2: 26.16,-7.685 cw(c27.594,-9.119) 27.594,-7.091 28.105,-7.091 ccw(c27.334,-7.862) 27.334,-6.771 25.658,-6.771
  region net GND2: 20.016,-6.195 ccw(c18.263,-6.195) 18.263,-4.442 13.043,-4.442 cw(c13.729,-4.442) 13.729,-3.757 20.575,-3.757 cw(c20.575,-4.239) 21.057,-4.239 21.057,-6.576
  region net PWM_WHITE: 29.184,-1.848 29.467,-2.131 30.578,-2.131 32.516,-0.193 34.652,1.989 cw(c35.437,1.313) 35.36,2.346 35.387,2.346 cw(c35.387,1.838) 35.747,2.197 cw(c36.363,1.582) 36.363,2.452 36.498,2.452 36.402,2.548 ccw(c35.967,2.113) 35.967,2.728 35.659,2.728 ccw(c35.659,2.312) 35.412,2.647 35.397,2.667 35.566,2.836 35.046,2.925 34.521,2.4 33.039,2.4 33.039,1.782 32.538,1.281 31.922,1.274 31.912,1.264 31.26,0.971 29.184,-1.105
  region net GND2: 42.476,-6.221 cw(c42.476,-7.4) 43.656,-7.4 43.656,-7.729 ccw(c43.656,-7.635) 43.75,-7.635 43.75,-6.198 43.151,-6.198 cw(c43.151,-6.069) 43.022,-6.069
  pour cut-out: 29.648,9.455 31.661,9.455 ccw(c31.077,6.983) 31.077,9.523 30.176,9.523 ccw(c30.176,7.439)
  region net +15V: 32.977,8.675 36.317,5.335 36.908,5.927 cw(c37.319,5.516) 37.319,6.097 ccw(c37.181,6.097) 37.279,6.195 33.762,9.712 ccw(c31.966,7.916) 31.966,10.456 23.488,10.456 ccw(c23.488,9.073) 22.105,9.073 ccw(c23.539,9.073) 23.539,7.639 23.758,7.639 cw(c23.758,5.099) 26.298,5.099 26.298,5.005 26.382,4.606 cw(c26.749,4.239) 26.749,4.758 27.428,4.758 27.428,5.067 28.455,4.04 30.34,5.005 30.34,7.739 31.275,8.675
  region net GND2: 24.771,-10.051 25.637,-10.917 33.61,-10.917 35.164,-9.362 35.243,-9.362 35.162,-9.282 35.386,-9.282 35.921,-8.747 35.921,-8.365 35.529,-8.757 35.354,-8.757 35.249,-8.652 34.592,-8.712 34.59,-8.71 34.562,-8.715 34.549,-8.716 34.549,-8.717 33.849,-8.839 33.849,-9.231 32.928,-10.152 25.884,-10.152 25.271,-9.539 25.271,-8.109 26.289,-7.091 28.105,-7.091 28.531,-6.665 28.531,-0.465 30.242,1.246 30.242,2.146 26.983,2.146 26.537,1.7 26.537,-2.031 cw(c23.997,-2.031) 25.793,-3.827 24.892,-4.727 cw(c23.199,-3.034) 23.199,-5.429 23.023,-5.429 ccw(c23.023,-6.557) 21.895,-6.557 ccw(c22.962,-6.557) 22.962,-7.624 23.143,-7.624 cw(c23.143,-9.238) 24.757,-9.238 24.757,-9.854 ccw(c24.757,-9.465) 24.771,-9.854
  region net GND2: 38.79,2.17 38.478,1.858 38.478,1.403
  region net GND2: 42.907,2.95 41.799,1.843 39.176,1.843
  region net GND2: 41.749,1.843 42.39,2.484 42.44,2.484 43.257,3.301 43.257,3.711 41.631,3.711 41.098,3.178
  region net GND2: 44.869,-9.809 45.573,-10.513 46.33,-10.513 46.33,-10.107 45.441,-9.218
  region: -14.959,-4.941
  region: -13.868,-6.449 -13.538,-6.779 -13.538,-8.532 -13.919,-8.913 -14.858,-8.913 -15.189,-8.583 -15.189,-6.779 -14.858,-6.449
  region net GND2: 31.245,3.547 34.225,3.547 35.333,4.655 35.333,5.238 32.905,7.666 32.56,7.666 31.725,7.394 32.014,7.105 32.014,6.591 31.245,5.821
  region net GND2: 25.548,2.528 25.913,2.27 25.655,2.009 24.943,2.187
  region: -37.693,10.696 -36.804,9.807 -36.804,8.664 -37.693,7.775 -43.408,7.775 -43.789,8.156 -43.789,10.315 -43.408,10.696
  region net SWDCLK: 43.825,1.516 44.38,2.071 44.38,2.499 44.153,2.726 43.64,2.726 43.449,2.534 43.449,1.899 43.601,1.747 43.601,1.509
  region: 43.447,2.011
  region net GND2: 42.22,2.573 42.924,3.277 41.842,3.277 41.458,2.893 41.458,2.55
  region net GND2: 36.107,-8.728 36.107,-9.056 33.821,-11.342 30.872,-11.342 31.39,-10.825
  region: 35.913,-9.16
  region net GND2: 26.787,0.636 26.787,-4.34 24.265,-4.34 24.265,0.268 25.024,0.268
  region net GND2: 6.122,12.148 6.122,11.578 12.519,11.578 12.519,12.548
  region net GND: -39.986,-6.9 -37.039,-6.9 -35.991,-7.948 -30.735,-7.948 -29.706,-8.977 -29.706,-10.342 -39.617,-10.342 -40.919,-9.04
  region net GND2: 13.945,-2.639
  region net GND2: 14.799,1.94 12.946,0.765 6.577,0.765 6.577,-3.979 7.077,-4.479 13.451,-4.479 16.257,-1.673
  region net NetD2_1: 12.218,2.949 15.021,5.752 15.021,9.798 14.25,10.569 7.265,10.569 6.757,10.061 6.757,4.752 6.757,3.457 7.265,2.949
  region net GND2: 33.859,-0.514 35.196,-0.514 35.243,-0.467 35.243,1.016 35.514,1.287 39.717,1.287 40.934,2.504 39.964,2.837 39.203,2.077 38.53,1.91 38.375,1.755 35.269,1.755 33.859,0.345
  region net GND2: 33.506,-9.574 33.456,-9.624 32.919,-9.624 32.284,-8.989 32.284,-10.513 33.318,-10.513 33.554,-10.277
  region net GND2: 33.61,-10.917 33.185,-11.342 32.478,-11.342 31.903,-10.767
  region net NetD5_1: -19.024,-4.163 -19.532,-3.655 -21.183,-3.655 -22.453,-2.385 -22.453,3.965 -19.913,6.505 -10.261,6.505 -7.975,6.505 -7.721,6.759 -7.721,8.791 -7.975,9.045 -10.261,9.045 -21.183,9.045 -23.596,6.632 -23.596,-4.417 -21.437,-6.576 -20.929,-7.084 -19.532,-7.084 -19.024,-6.576
  region net NetC12_1: -15.976,-0.099 -18.77,2.695 -21.143,2.695 -21.417,2.421 -21.417,0.108 -21.152,-0.157 -18.077,-0.157 -17.754,-0.48 -17.754,-8.608 -17.373,-8.989 -16.357,-8.989 -15.976,-8.608
  pour cut-out: -22.936,-7.186 -23.215,-6.906 -23.215,-8.202 -22.936,-8.481
  region net NetC1_1: -40.106,-4.036 -38.963,-5.179 -37.109,-5.179 -36.093,-6.195 -26.39,-6.195 -20.508,-12.164 -10.642,-12.164 -7.594,-9.116 -7.594,-6.322 -8.229,-5.687 -10.007,-5.687 -10.642,-6.322 -10.642,-8.29 -12.357,-10.005 -19.786,-10.005 -25.501,-4.29 -28.168,-4.29 -28.422,-4.544 -34.01,-4.544 -36.931,-1.623 -39.217,-1.623 -40.106,-2.512
  region net NetF1_2: -46.964,10.569 -46.456,10.061 -46.456,8.029 -46.964,7.521 -51.917,7.521 -52.425,8.029 -52.425,10.061 -51.917,10.569
  region: -29.946,3.203 -29.565,2.822 -29.565,-2.893 -30.2,-3.528 -32.74,-3.528 -33.248,-3.02 -33.248,-2.385 -35.788,0.155 -35.788,2.822 -35.407,3.203
  region net NetC8_2: -38.423,2.521 -36.923,2.521 -36.423,3.021 -36.423,5.489 -36.955,6.021 -51.923,6.021 -52.423,5.521 -52.423,3.521 -51.923,3.021 -46.782,3.021 -45.423,1.662 -45.423,-1.479 -49.423,-5.479 -49.423,-9.979 -48.923,-10.479 -46.423,-10.479 -41.884,-5.94 -41.884,-0.94
  region: -47.423,11.021
  region net DRAIN: -10.642,0.028 -9.88,-0.734 -7.213,-0.734 -4.546,1.933 -4.546,9.045 -8.483,12.982 -35.153,12.982 -36.042,12.093 -36.042,10.188 -35.153,9.299 -26.517,9.299 -25.425,10.391 -7.619,10.391 -5.943,8.715 -5.943,2.39 -6.696,1.637 -6.959,1.552 -9.88,1.552 -10.642,0.79
  pour cut-out: -5.616,1.701 -5.308,1.736 -5.308,2.009
  region: 46.544,-0.484
  region: 42.763,11.105 45.678,8.19 45.678,6.183 44.9,5.405 42.615,5.405 39.442,8.578 39.442,10.361 40.426,11.345 42.523,11.345 42.909,10.96
  region net +15V: 26.298,3.193 26.298,5.005 30.34,5.005 30.34,3.193
  region net MD_RESET: 43.134,-3.218 43.134,-3.259 43.445,-3.571 43.445,-3.985 43.15,-4.28 42.731,-4.28 42.449,-3.998 42.449,-3.558 42.801,-3.205 42.914,-3.205
  region net GND2: 45.555,-8.41 44.747,-8.41 44.026,-7.689 43.985,-7.729 43.656,-7.729 43.656,-8.595 44.869,-9.809 45.717,-9.809
  region net +3.3V: 36.854,-10.113 37.152,-10.411 37.152,-10.813 36.852,-11.113 36.438,-11.113 36.145,-10.82 36.145,-10.401 36.559,-9.987 36.64,-9.987
  region net 52>32: 33.88,-4.014 33.342,-4.014 31.097,-6.259 31.097,-6.818 30.739,-7.176 29.329,-7.176 29.073,-6.921 29.073,-5.736 29.341,-5.468 30.688,-5.468 32.54,-3.616 33.903,-3.616
  region net 32>52: 33.943,-2.616 32.427,-2.616 30.415,-4.628 29.344,-4.628 28.998,-4.282 28.998,-3.258 29.363,-2.893 31.141,-2.893 31.818,-2.216 33.867,-2.216
  region net GND2: 26.553,-3.209
  region net +3.3V: 37.763,3.879 37.685,3.801 35.932,3.801 35.265,3.134 35.265,2.677 35.488,2.454 37.648,2.454 38.73,3.536 38.73,3.796

## Silkscreen, mask and mechanical layers (free items; w line width, h text height)
Top Overlay:
  circle w0.254: c39.142,-7.541 r0.127
  region: -51.155,10.823
  text "ACL" at -51.917,10.95 h0.76
  text "W" at 47.168,8.461 h0.76 r90
  text "GND" at 31.903,5.284 h0.76
  text "15V" at 26.569,5.235 h0.76
  text "ACN" at -48.615,4.092 h0.76
  text "Y" at 47.168,3.457 h0.76 r90
Bottom Overlay:
  text "ACL" at -49.885,10.95 h0.76
  text "W" at 47.168,8.969 h0.76 r90
  text "ACN" at -46.583,4.092 h0.76
  text "Y" at 47.194,3.99 h0.76 r90
  text "3.3" at 31.522,-2.131 h0.76 r270
  text "GND" at 25.172,-2.258 h0.76 r270
  text "GND" at 25.934,-2.766 h0.76 r90
  text "3>5" at 31.522,-4.798 h0.76 r270
  text "GND" at 25.934,-5.306 h0.76 r90
  text "5>3" at 31.522,-7.338 h0.76 r270
  text "CLK" at 25.908,-7.935 h0.76 r90
  text "DIO" at 31.46,-9.839 h0.76 r270
Bottom Solder:
  region: 34.101,0.779 33.351,0.028 33.351,-0.514 34.351,-0.514 35.157,0.292

## Text inside footprints (layer, text, board x,y; h text height)
D4: Top Overlay "AC" at -47.218,-5.687 h0.76 r270; Top Overlay "AC" at -47.091,-2.131 h0.76 r270